# EAGLE board untitled - Kopia (EAGLE 6.5.0)
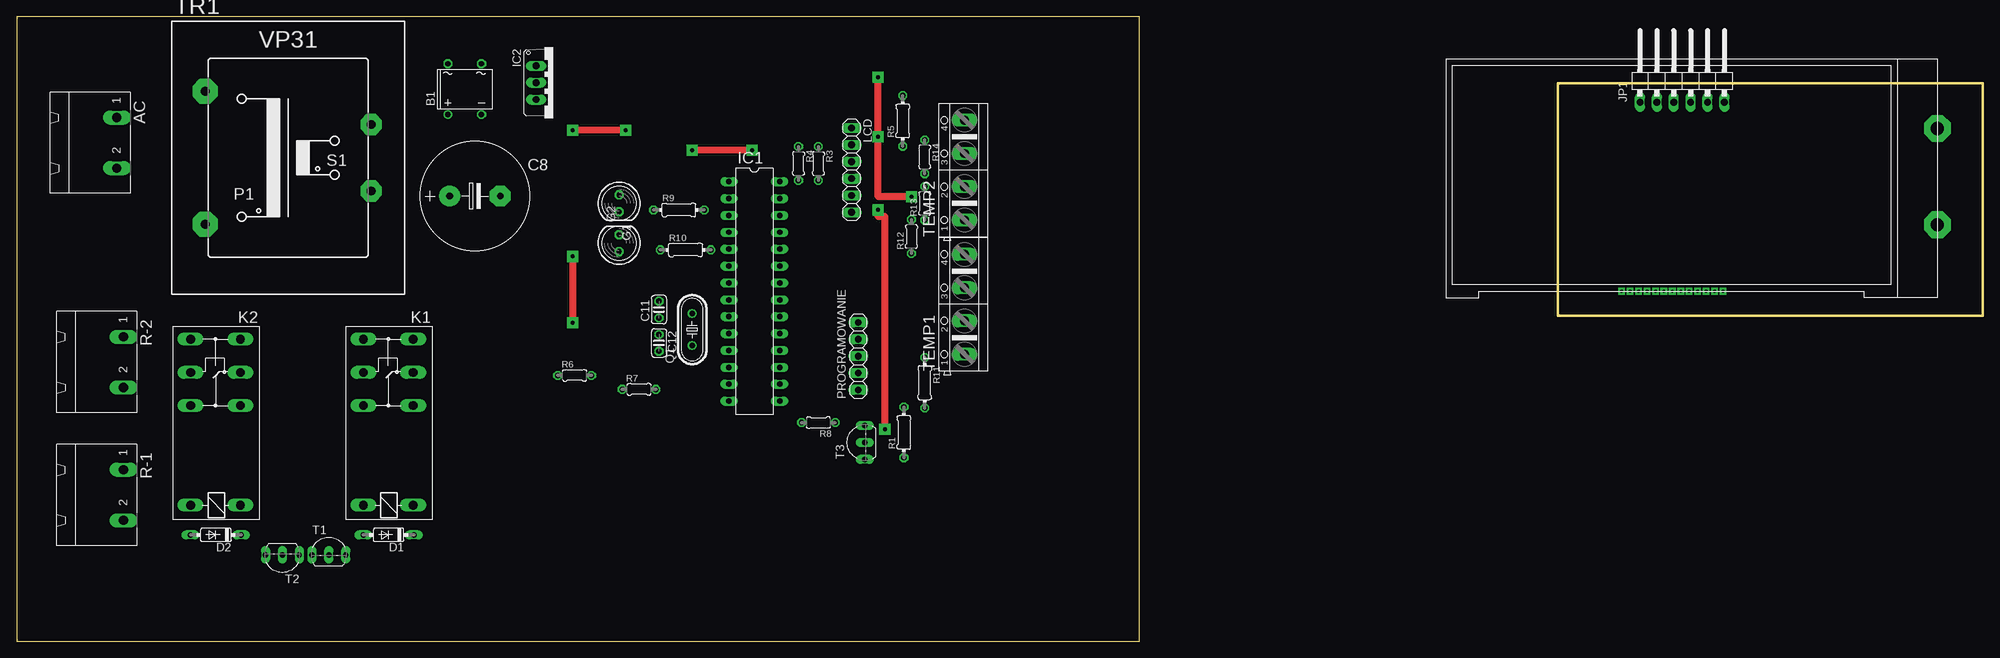
[diagram p0: board, top side]
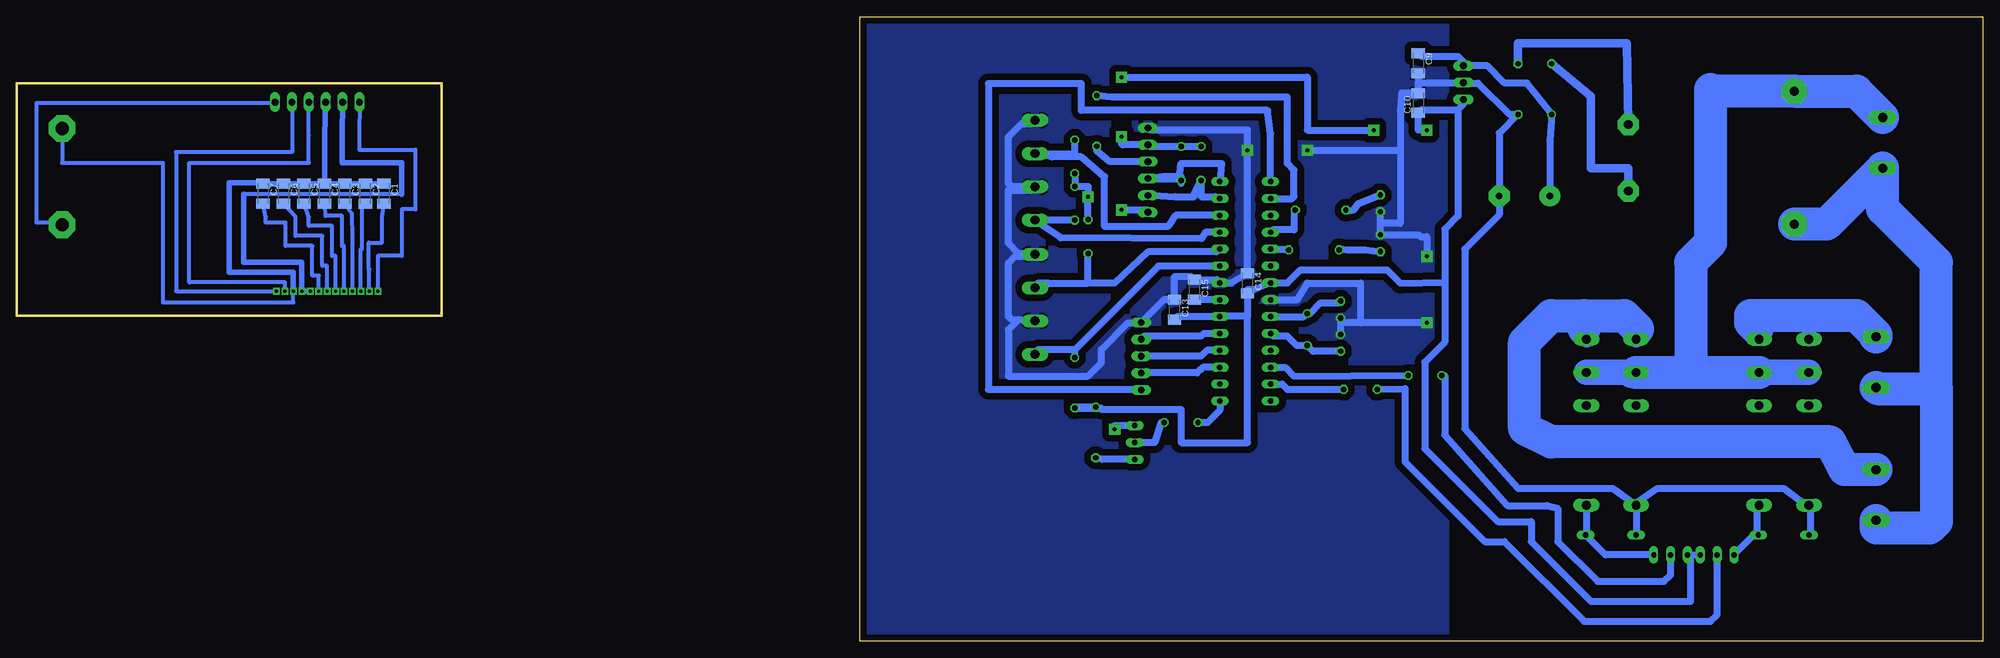
[diagram p1: board, bottom side, seen from below]

Size 296 x 94 mm. Coordinates in mm from the lower left corner, seen from the top.
Outline: 0,0 169,0 169,94 0,94 0,0
Outline: 296,84 232,84 232,49 296,49 296,84
Copper layers (1*16): Top 0.035mm / dielectric 1.5mm / Bottom 0.035mm
Design rules "default": minimum track width 10mil, minimum drill 24mil, track to track 8mil, track to pad 8mil, pad to pad 8mil, via to via 8mil, smd to smd 8mil, copper to edge 40mil, drill to drill 8mil, minimum pad ring 10mil, minimum via ring 8mil, stop-mask expansion 4mil, vias tented up to drill 0mil, thermal gap 10mil

## Footprints (pad centres in the part's own frame; a part is rotated, then mirrored left to right if it is on the bottom)
GMSTBA2 = drill 1.397 long: 1 -3.81,5.08; 2 3.81,5.08
DB = drill 0.813: + -2.54,-3.81 | drill 0.813 octagon: - 2.54,-3.81; AC1 2.54,3.81; AC2 -2.54,3.81
C1206K = smd 1.5 x 2: 1 -1.5,0; 2 1.5,0
E7,5-16 = drill 1.016 pad 3.15: + -3.81,0 | drill 1.016 pad 3.15 octagon: - 3.81,0
C025-024X044 = drill 0.813 octagon: 1 -1.27,0; 2 1.27,0
DO35-7 = drill 0.813 long: A 3.81,0; C -3.81,0
LED5MM = drill 0.813 octagon: A -1.27,0; K 1.27,0
DIL28-3 = drill 0.813 long: 1 -16.51,-3.81; 2 -13.97,-3.81; 3 -11.43,-3.81; 4 -8.89,-3.81; 5 -6.35,-3.81; 6 -3.81,-3.81; 7 -1.27,-3.81; 8 1.27,-3.81; 9 3.81,-3.81; 10 6.35,-3.81; 11 8.89,-3.81; 12 11.43,-3.81; 13 13.97,-3.81; 14 16.51,-3.81; 15 16.51,3.81; 16 13.97,3.81; 17 11.43,3.81; 18 8.89,3.81; 19 6.35,3.81; 20 3.81,3.81; 21 1.27,3.81; 22 -1.27,3.81; 23 -3.81,3.81; 24 -6.35,3.81; 25 -8.89,3.81; 26 -11.43,3.81; 27 -13.97,3.81; 28 -16.51,3.81
TO220V = drill 1.016 long: 1 -2.54,-2.54; 2 0,-2.54; 3 2.54,-2.54
1X06/90 = drill 1.016 long: 1 -6.35,-3.81; 2 -3.81,-3.81; 3 -1.27,-3.81; 4 1.27,-3.81; 5 3.81,-3.81; 6 6.35,-3.81
G2RE = drill 1.321 long: 1 -2.54,-3.683; 2 -2.54,3.81; O0 12.471,-3.683; O1 12.471,3.81; P0 17.45,-3.683; P1 17.45,3.81; S0 22.454,-3.683; S1 22.454,3.81
1X06 = drill 1.016 long: 1 -6.35,0; 2 -3.81,0; 3 -1.27,0; 4 1.27,0; 5 3.81,0; 6 6.35,0
1X05 = drill 1.016 long: 1 -5.08,0; 2 -2.54,0; 3 0,0; 4 2.54,0; 5 5.08,0
HC49/S = drill 0.813: 1 -2.413,0; 2 2.413,0
0204/7 = drill 0.813 octagon: 1 -3.81,0; 2 3.81,0
0204/5 = drill 0.813 octagon: 1 -2.54,0; 2 2.54,0
TO92-CBE = drill 0.813 long: B 0,0; C -2.54,0; E 2.54,0
AK500/4 = drill 1.321 long: 1 -7.518,0; 2 -2.489,0; 3 2.489,0; 4 7.518,0
VP31 = drill 1.321 pad 3.81 octagon: 1 -12.497,10.008; 2 -12.497,-10.008 | drill 1.321 pad 3.175 octagon: 3 12.497,-5.004; 4 12.497,5.004
RX2004A = drill 2 pad 4 octagon: LED+ 44,-5; LED- 44,9.5 | drill 0.5 square: P$1 -3.51,-15.01; P$2 -2.24,-15.01; P$3 -0.97,-15.01; P$4 0.3,-15.01; P$5 1.57,-15.01; P$6 2.84,-15.01; P$7 4.11,-15.01; P$8 5.38,-15.01; P$9 6.65,-15.01; P$10 7.92,-15.01; P$11 9.19,-15.01; P$12 10.46,-15.01; P$13 11.73,-15.01

## Placement (x,y rotation side)
AC  GMSTBA2  [GMSTBA2]  10,75 270 top
B1  DBL207G  [DB]  67.45,83.09 0 top
C1  0,1u  [C1206K]  240.69,67.36 270 bottom
C2  0,1u  [C1206K]  243.5,67.36 270 bottom
C3  0,1u  [C1206K]  246.58,67.36 270 bottom
C4  0,1u  [C1206K]  249.66,67.36 270 bottom
C5  0,1u  [C1206K]  252.74,67.36 270 bottom
C6  0,1u  [C1206K]  255.82,67.36 270 bottom
C7  0,1u  [C1206K]  258.9,67.36 270 bottom
C8  2200u  [E7,5-16]  69,67 0 top
C9  0,1u  [C1206K]  85,87 270 bottom
C10  0,1u  [C1206K]  85,81 90 bottom
C11  [C025-024X044]  96.7,49.9 90 top
C12  [C025-024X044]  96.7,44.9 270 top
C13  0,1u  [C1206K]  121.7,49.9 270 bottom
C14  0,1u  [C1206K]  110.7,53.9 270 bottom
C15  0,1u  [C1206K]  118.7,52.9 270 bottom
D1  1N4148DO35-7  [DO35-7]  56,16 180 top
D2  1N4148DO35-7  [DO35-7]  30,16 180 top
G1  [LED5MM]  90.7,65.9 270 top
G2  [LED5MM]  90.7,59.9 90 top
IC1  MEGA8-P  [DIL28-3]  111.05,52.65 270 top
IC2  7805TV  [TO220V]  80.75,84.05 270 top
JP1  [1X06/90]  250.74,84.94 0 top
K1  G2RE  [G2RE]  56,23 90 top
K2  G2RE  [G2RE]  30,23 90 top
LCD  [1X06]  125.7,70.9 270 top
PROGRAMOWANIE  [1X05]  126.7,42.9 90 top
Q1  [HC49/S]  101.7,46.9 90 top
R1  33  [0204/7]  133.57,31.42 90 top
R3  1k  [0204/5]  120.7,71.9 270 top
R4  1k  [0204/5]  117.7,71.9 270 top
R5  1k  [0204/7]  133.4,78.3 90 top
R6  1k  [0204/5]  84,40 0 top
R7  1k  [0204/5]  93.7,37.9 0 top
R8  1k  [0204/5]  120.7,32.9 180 top
R9  220  [0204/7]  99.7,64.9 0 top
R10  220  [0204/7]  100.7,58.9 0 top
R11  10k  [0204/7]  136.7,38.9 270 top
R12  10k  [0204/5]  134.7,60.9 90 top
R13  10k  [0204/5]  136.7,65.9 90 top
R14  10k  [0204/5]  136.7,72.9 270 top
R-1  GMSTBA2  [GMSTBA2]  11,22 270 top
R-2  GMSTBA2  [GMSTBA2]  11,42 270 top
T1  [TO92-CBE]  47,13 0 top
T2  [TO92-CBE]  40,13 180 top
T3  [TO92-CBE]  127.7,29.9 90 top
TEMP1  [AK500/4]  142.7,50.7 90 top
TEMP2  [AK500/4]  142.7,70.9 90 top
TR1  [VP31]  40.88,72.76 0 top
U$1  RX2004A  [RX2004A]  245.14,67.68 0 top

## Library data of the parts
AC R-1 R-2 = con-phoenix-762; MF: FARNELL; MPN: 1757242; OC_FARNELL: 3705171; OC_NEWARK: 71C4161
B1 = rectifier
C1-C15 R1 R3-R14 = rcl
D1 D2 = diode
G1 G2 = led
IC1 = atmel; OC_FARNELL: unknown; OC_NEWARK: unknown
IC2 = linear
JP1 LCD PROGRAMOWANIE = pinhead
K1 K2 = relay; OC_FARNELL: unknown; OC_NEWARK: unknown
Q1 = crystal; OC_FARNELL: 1667008; OC_NEWARK: unknown
T1-T3 = transistor
TEMP1 TEMP2 = con-ptr500; OC_FARNELL: unknown; OC_NEWARK: unknown
TR1 = trafo
U$1 = RX2004A

## Nets
AC1: AC.1 K1.P0 K1.P1 K2.P0 K2.P1 TR1.1
AC2: AC.2 R-1.2 R-2.2 TR1.2
G1: IC1.12 R6.2
G2: IC1.13 R7.2
GND: B1.- C8.- C9.2 C10.2 C11.1 C12.1 C13.1 C14.1 C15.1 D1.A D2.A G1.K G2.K IC1.8 IC1.22 IC2.2 K1.2 K2.2 LCD.1 PROGRAMOWANIE.5 TEMP1.2 TEMP1.4 TEMP2.2 TEMP2.4
L_LED+: JP1.6 U$1.LED+
LCD_SCL: JP1.4 U$1.P$12
LCD_SDA: JP1.5 U$1.P$13
LCDGND: C1.1 C2.1 C3.1 C4.1 C5.1 C6.1 C7.1 JP1.3 U$1.LED- U$1.P$11
LCDRES: JP1.1 U$1.P$1
LCDVCC: JP1.2 U$1.P$9 U$1.P$10
LED+: LCD.6 T3.E
LRES: LCD.3 R5.1
MISO: IC1.18 PROGRAMOWANIE.3
MOSI: IC1.17 PROGRAMOWANIE.2
N$1: C1.2 U$1.P$2
N$2: C2.2 U$1.P$3
N$3: C3.2 U$1.P$4
N$4: C4.2 U$1.P$5
N$5: C5.2 U$1.P$6
N$6: C6.2 U$1.P$7
N$7: C7.2 U$1.P$8
N$8: K1.S0 K1.S1 R-1.1
N$9: C11.2 IC1.9 Q1.2
N$10: B1.AC1 TR1.4
N$11: B1.AC2 TR1.3
N$12: C12.2 IC1.10 Q1.1
N$13: B1.+ C8.+ C9.1 IC2.1
N$14: C15.2 IC1.21
N$15: K2.S0 K2.S1 R-2.1
N$17: R1.1 T3.C
N$18: R6.1 T1.B
N$19: R8.1 T3.B
N$20: R7.1 T2.B
N$21: D2.C K2.1 T2.E
N$22: IC1.4 R9.2
N$23: IC1.5 R10.2
N$24: D1.C K1.1 T1.E
N$25: G1.A R9.1
N$26: G2.A R10.1
N$27: IC1.2 R5.2
RES: IC1.1 PROGRAMOWANIE.1
SCK: IC1.19 PROGRAMOWANIE.4
SCL: IC1.28 LCD.4 R3.2
SDA: IC1.27 LCD.5 R4.2
T1_IN: IC1.23 R11.1 TEMP1.1
T2_IN: IC1.24 R12.1 TEMP1.3
T3_IN: IC1.25 R13.1 TEMP2.1
T4_IN: IC1.26 R14.1 TEMP2.3
TLED+: IC1.15 R8.2
VCC: C10.1 C13.2 C14.2 IC1.7 IC1.20 IC2.3 LCD.2 R1.2 R3.1 R4.1 R11.2 R12.2 R13.2 R14.2 T1.C T2.C

## Tracks (layer width: path | path; a pad name or v marks a point on that pad's centre or on a via)
AC1
  Bottom 3.81: K2.P1 K2.P0 | K1.P0 53.45,40.45 53,40 52.64,40 K1.P1
  Bottom 5: K1.P1 44,40.45 | 44,40.45 K2.P0 | 44,40.45 44,57 41,60 41,83 40.77,82.77 TR1.1 19.04,82.77 AC.1
AC2
  Bottom 5: TR1.2 23.52,62.75 AC.2 15.08,65.08 7,57 7,38 | R-2.2 15.89,38 7,38 | 7,38 7,18 8,17 16,17 16.08,17.08 R-1.2
G1
  Bottom 1.016: IC1.12 105.02,41.22 103.7,39.9 R6.2
G2
  Bottom 1.016: IC1.13 105.48,38.68 104.7,37.9 R7.2
GND  (via drill 0.6 pad 1.68)
  Top 1.016: v83.7,57.9 v83.7,47.9 | v110.7,73.9 v101.7,73.9
  Bottom 1.016: 85,84 78.26,84 IC2.2 78.16,84 76,84 71.28,79.28 B1.- 72.81,76.46 C8.- 72.81,64.19 78,59 78,32 70,23 55.73,23 K1.2 | C9.2 85,84 | 85,84 C10.2 87.5,82.5 87.7,79.9 87.7,73.9 | K1.2 D1.A | K1.2 52.19,20.81 49,23 30,23 26,20 | 26,20 26,16.19 D2.A | 26,20 26,20.27 K2.2 | C11.1 96.7,47.9 | 96.7,47.9 C12.1 | IC1.8 103.22,51.38 101.7,53.9 93.7,53.9 93.7,47.9 | 93.7,47.9 96.7,47.9 | 90.7,62.9 G2.K 84.97,61.17 84.7,60.9 83.7,60.9 v83.7,57.9 | 90.7,62.9 G1.K | 87.7,73.9 87.7,62.9 90.7,62.9 | v83.7,47.9 93.7,47.9 | v101.7,73.9 87.7,73.9 | LCD.1 125.35,76.9 110.7,76.9 v110.7,73.9 C14.1 113.18,53.92 IC1.22 115.34,54.4 C15.1 119.2,54.9 121.7,54.9 C13.1 123.28,51.4 PROGRAMOWANIE.5 126.78,47.9 128.7,47.9 132.7,43.9 132.7,41.9 134.7,39.9 146.7,39.9 146.7,46.9 145.19,48.41 TEMP1.2 146.21,48.41 146.7,48.9 146.7,56.9 145.7,57.9 143.22,57.9 TEMP1.4 145.22,58.42 146.7,59.9 146.7,67.9 143.21,67.9 TEMP2.2 146.21,68.41 146.7,68.9 146.7,75.9 144.7,77.9 143.22,77.9 TEMP2.4
  pour Bottom (isolate 1.016): 81,94 169,94 169,0 81,0
L_LED+
  Bottom 0.61: U$1.LED+ 289.14,63 293,63 293,81 257,81 257,81.13 JP1.6
LCD_SCL
  Bottom 0.61: U$1.P$12 255.6,54 270,54 270,72 252,72 252,76.13 JP1.4
LCD_SDA
  Bottom 0.61: JP1.5 254.55,73.6 272,73.6 272,52.67 U$1.P$13
LCDGND
  Bottom 0.61: U$1.LED- 289.14,72 274,72 274,51 254.33,51 U$1.P$11 254.4,52.67 | 258.9,69 C7.1
  Bottom 0.813: C1.1 C2.1 C3.1 C4.1 | C4.1 C5.1 C6.1 C7.1 | 254.4,52.67 254.4,55.5 264,55.5 264,69 258.9,69 | JP1.3 249.66,76.13 C4.1
LCDRES
  Bottom 0.61: JP1.1 244.4,76.13 244.4,74 236,74 236,65 238,65 238,58 241.63,58 U$1.P$1
LCDVCC
  Bottom 0.61: 238,67.3 261.8,67.3
  Bottom 0.813: 261.8,67.3 261.8,57 253.06,57 U$1.P$10 U$1.P$9 | JP1.2 247,76.13 247,72 238,72 238,67.3
LED+  (via drill 0.6 pad 1.68)
  Top 1.016: v130.7,31.9 130.7,63.9 129.7,63.9 v129.7,64.9
  Bottom 1.016: T3.E 130.7,32.44 v130.7,31.9 | v129.7,64.9 125.7,64.9 LCD.6
LRES
  Bottom 1.016: LCD.3 131.43,72.17 133.4,73.8 R5.1
MISO
  Bottom 1.016: IC1.18 116.84,43.76 117.7,42.9 PROGRAMOWANIE.3
MOSI
  Bottom 1.016: IC1.17 117.38,41.22 117.7,40.9 117.8,40.9 118.3,40.4 126.66,40.4 PROGRAMOWANIE.2
N$1
  Bottom 0.61: U$1.P$2 242.9,56 243,56 243,60 241,60 241,63.86 C1.2
N$2
  Bottom 0.61: U$1.P$3 244.17,59 244,59 244,65.86 C2.2
N$3
  Bottom 0.61: U$1.P$4 245.44,61 245.5,64 245.5,64.36 C3.2
N$4
  Bottom 0.61: U$1.P$5 246.71,59.5 247,59.5 247,64 249.5,64 249.5,64.36 C4.2
N$5
  Bottom 0.61: U$1.P$6 247.98,58 248.5,58 248.5,62.5 252,62.5 252,63.86 C5.2
N$6
  Bottom 0.61: U$1.P$7 249.25,56.5 250,56.5 250,61 254,61 254,63.86 C6.2
N$7
  Bottom 0.61: U$1.P$8 250.52,55 251.5,55 251.5,59.5 255.5,59.5 255.5,63 258.5,63 258.5,63.86 C7.2
N$8
  Bottom 2.54: 52,47 52,45.64 K1.S1 | K1.S0 59.68,45.68 60,47
  Bottom 5: R-1.1 20.81,25.81 23,30 65,30 69,32 69,45 65,49 60,49 | 60,49 54,49 52,47 | 60,47 60,49
N$9
  Bottom 1.016: IC1.9 102.17,48.84 Q1.2 101.29,49.31 99.7,50.9 96.97,50.9 C11.2
N$10
  Bottom 1.016: B1.AC1
  Bottom 1.27: TR1.4 53.6,89.99 70,90 B1.AC1
N$11
  Bottom 1.27: B1.AC2 59,82 59,71.19 53.38,71.19 TR1.3
N$12
  Bottom 1.016: C12.2 100.84,43.63 Q1.1 103.29,44.49 104.7,45.9 106.84,45.9 IC1.10
N$13
  Bottom 1.016: C8.+ 65.19,75.38 B1.+ 68.63,84 72,84 74.59,86.59 IC2.1 78.21,87.21 79,88 84.5,88 C9.1
N$14
  Bottom 1.016: IC1.21 118.68,51.38 C15.2
N$15
  Bottom 1.93: 34,47 34,45.77 K2.S0
  Bottom 2.184: K2.S1 26.19,47.81 26,48 26,49
  Bottom 5: 16.2,45.93 R-2.1 16.08,46.08 19,49 26,49 35,49 35,48 34,47
N$17
  Bottom 1.016: T3.C 132.57,27.36 R1.1
N$18
  Bottom 1.016: R6.1 81,40 81,31 71.6,20.4 65.6,20.4 64,20 64,15 58,9 48,9 47,10 T1.B
N$19
  Bottom 1.016: R8.1 123.7,32.9 124.7,29.9 T3.B
N$20
  Bottom 1.016: R7.1 87,38 87,27 75,15 72,15 60,3 41,3 40,4 T2.B
N$21
  Bottom 1.016: K2.1 33.68,20.32 34,20 34,16.19 D2.C 34.46,16 T2.E
N$22
  Bottom 1.016: R9.2 103.7,64.9 103.7,61.9 106.88,61.9 IC1.4
N$23
  Bottom 1.016: R10.2 107.14,58.9 IC1.5
N$24
  Bottom 1.016: K1.1 59.68,16.13 D1.C 56.81,13 T1.E
N$25
  Bottom 1.016: R9.1 95.89,64.71 94.7,64.9 93.97,65.9 G1.A
N$26
  Bottom 1.016: R10.1 96.89,59.09 95.7,58.9 92.97,58.9 G2.A
N$27
  Bottom 1.016: IC1.2 103.98,66.62 103.7,66.9 103.7,70.9 104.7,71.9 104.7,81.9 131.16,81.9 R5.2
RES
  Bottom 1.016: IC1.1 107.24,76.44 107.7,79.9 135.7,79.9 135.7,83.9 149.7,83.9 149.7,37.9 126.78,37.9 PROGRAMOWANIE.1
SCK
  Bottom 1.016: IC1.19 117.3,46.3 117.7,45.9 126.24,45.9 PROGRAMOWANIE.4
SCL
  Bottom 1.016: 120.7,68.9 R3.2 120.7,69.9 123.43,69.9 LCD.4 120.97,69.63 120.7,71.9 114.6,71.9 IC1.28
SDA
  Bottom 1.016: LCD.5 124.89,67.09 121.7,66.9 118.7,66.9 118.7,67.36 R4.2 117.7,66.9 115.58,66.9 IC1.27
T1_IN
  Bottom 1.016: IC1.23 124.14,56.46 136.7,43.9 | 136.7,43.9 142.18,43.9 TEMP1.1 | R11.1 136.7,43.9
T2_IN
  Bottom 1.016: IC1.24 115,59 115.4,58.6 125.7,58.6 130.7,53.9 134.7,53.9 | 140.7,53.9 142.19,53.9 TEMP1.3 141.21,53.39 140.7,53.9 | 140.7,53.9 134.7,53.9 | 134.7,53.9 R12.1
T3_IN
  Bottom 1.016: IC1.25 117.06,61.54 117.6,60.6 138.82,60.7 TEMP2.1 142.7,63.36 R13.1
T4_IN
  Bottom 1.016: IC1.26 121.52,64.08 122.7,62.4 132.2,62.4 132.2,69.9 135.7,72.9 140.21,72.9 TEMP2.3 136.7,73.39 R14.1
TLED+
  Bottom 1.016: IC1.15 114.86,34.74 116.7,32.9 R8.2
VCC  (via drill 0.6 pad 1.68)
  Top 1.016: v129.7,84.9 v129.7,75.9 129.7,66.9 v134.7,66.9 | v91.7,76.9 v83.7,76.9
  Bottom 1.016: 79,80 84.5,80 C10.1 85,76.9 v83.7,76.9 | 79,80 78.21,80.79 IC2.3 | T2.C T1.C 44,12.54 44,6 59,6 68,15 68,18 73,18 84,29 84,42 81,45 81,54 | 110.7,48.9 C14.2 110.7,52.9 109.68,52.92 IC1.7 104.68,53.92 102.7,55.9 89.7,55.9 87.7,53.9 81,54 | 110.7,48.9 114.8,48.9 IC1.20 121.26,48.84 C13.2 | R4.1 R3.1 125.43,74.44 LCD.2 129.51,74.71 129.7,74.9 v129.7,75.9 | 79,80 79,64 81,62 81,54 | v129.7,84.9 101.7,84.9 101.7,76.9 v91.7,76.9 | R14.2 R13.2 134.7,68.44 v134.7,66.9 R12.2 | R1.2 136.7,35.23 R11.2 132.7,35.09 132.7,34.9 120.7,34.9 120.7,29.9 110.7,29.9 110.7,48.9